# Altium PCB C8T6.PcbDoc
Units mil, origin at the board's own origin, x right, y up, seen from the top; angles counter-clockwise.
Board outline 2210.03 x 1420.03 mil, 2 copper layers (Top Layer, Bottom Layer); 41 components, 55 nets, 198 pads, 55 vias.
Unrouted connection lines stored in the file: 1.
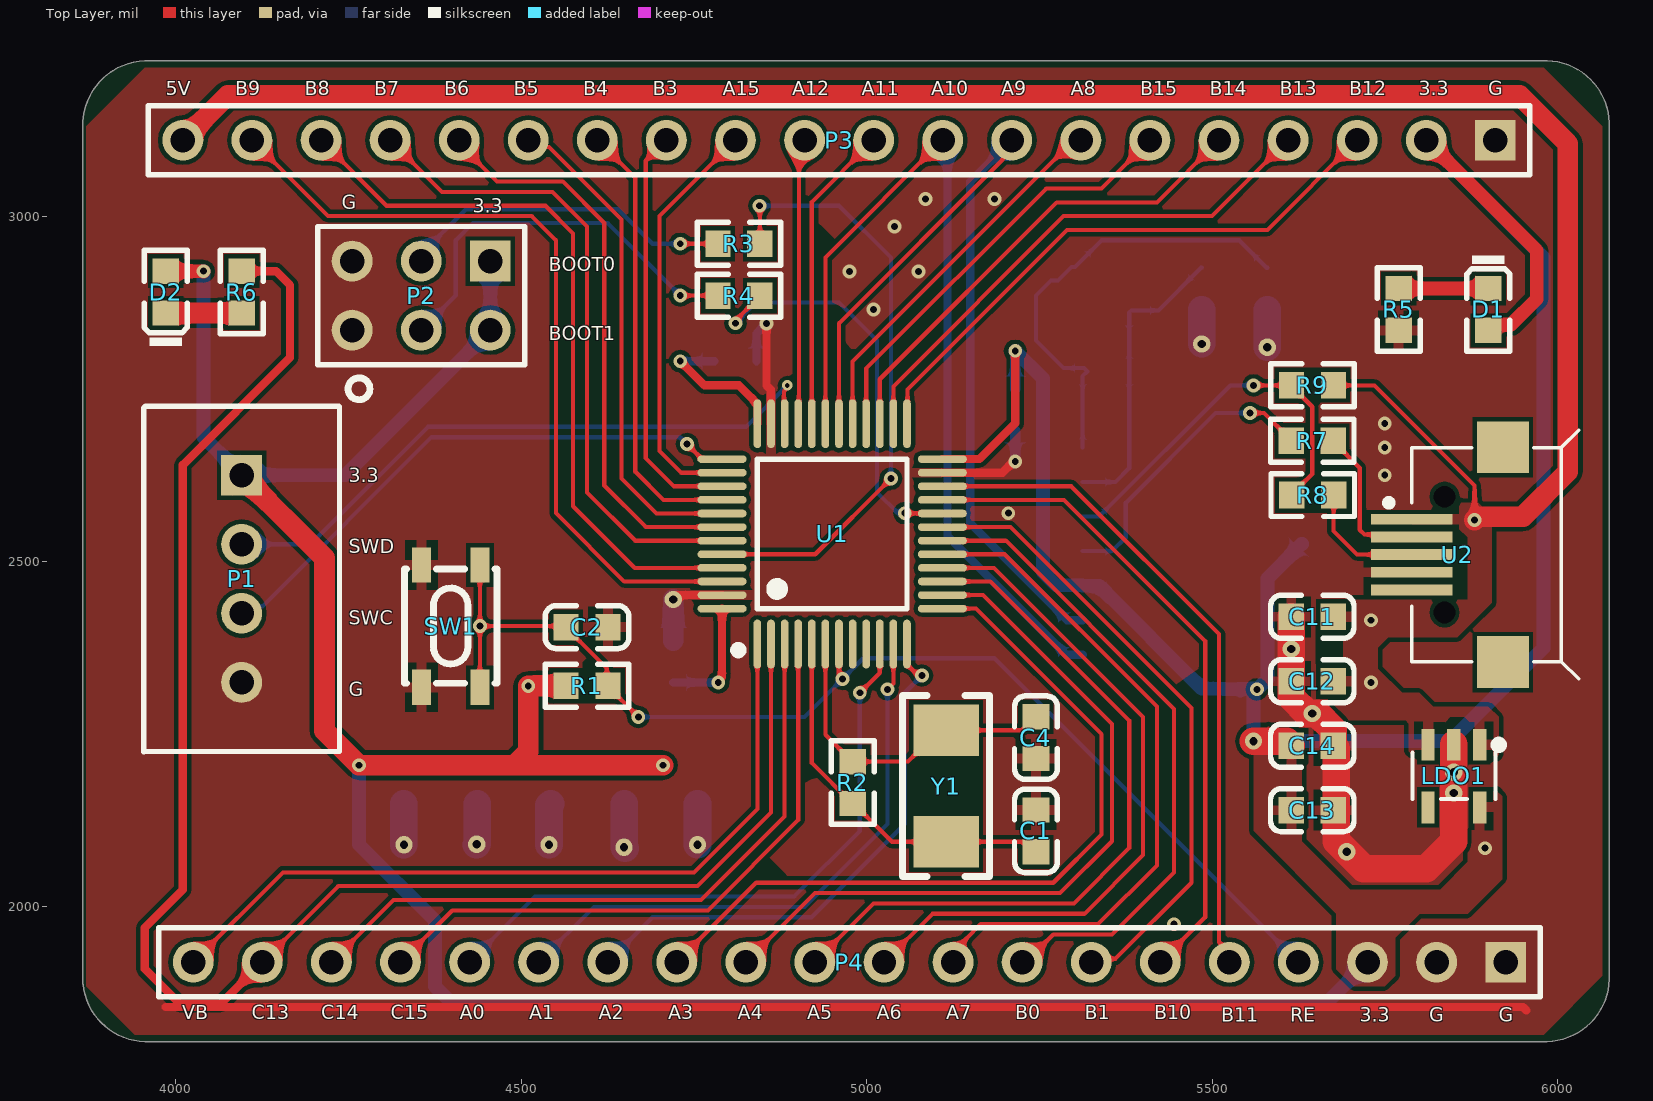
[diagram p0: Top Layer view]
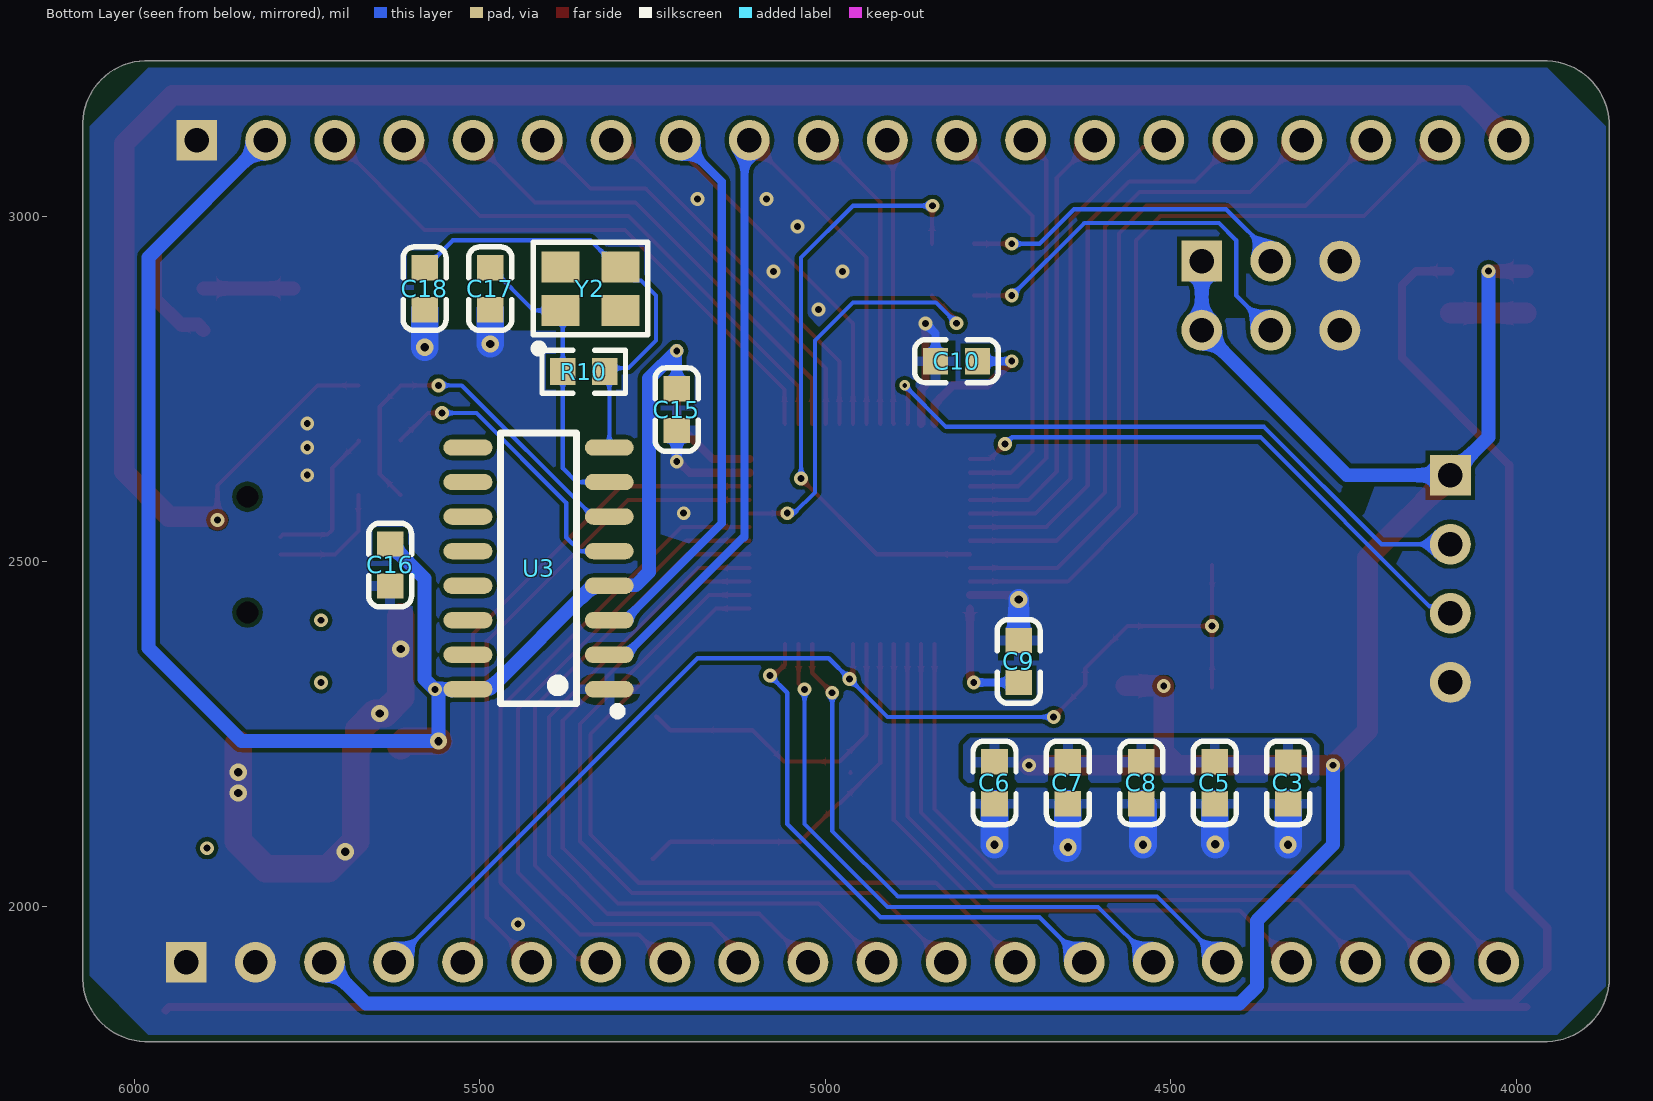
[diagram p1: Bottom Layer view, seen from below]
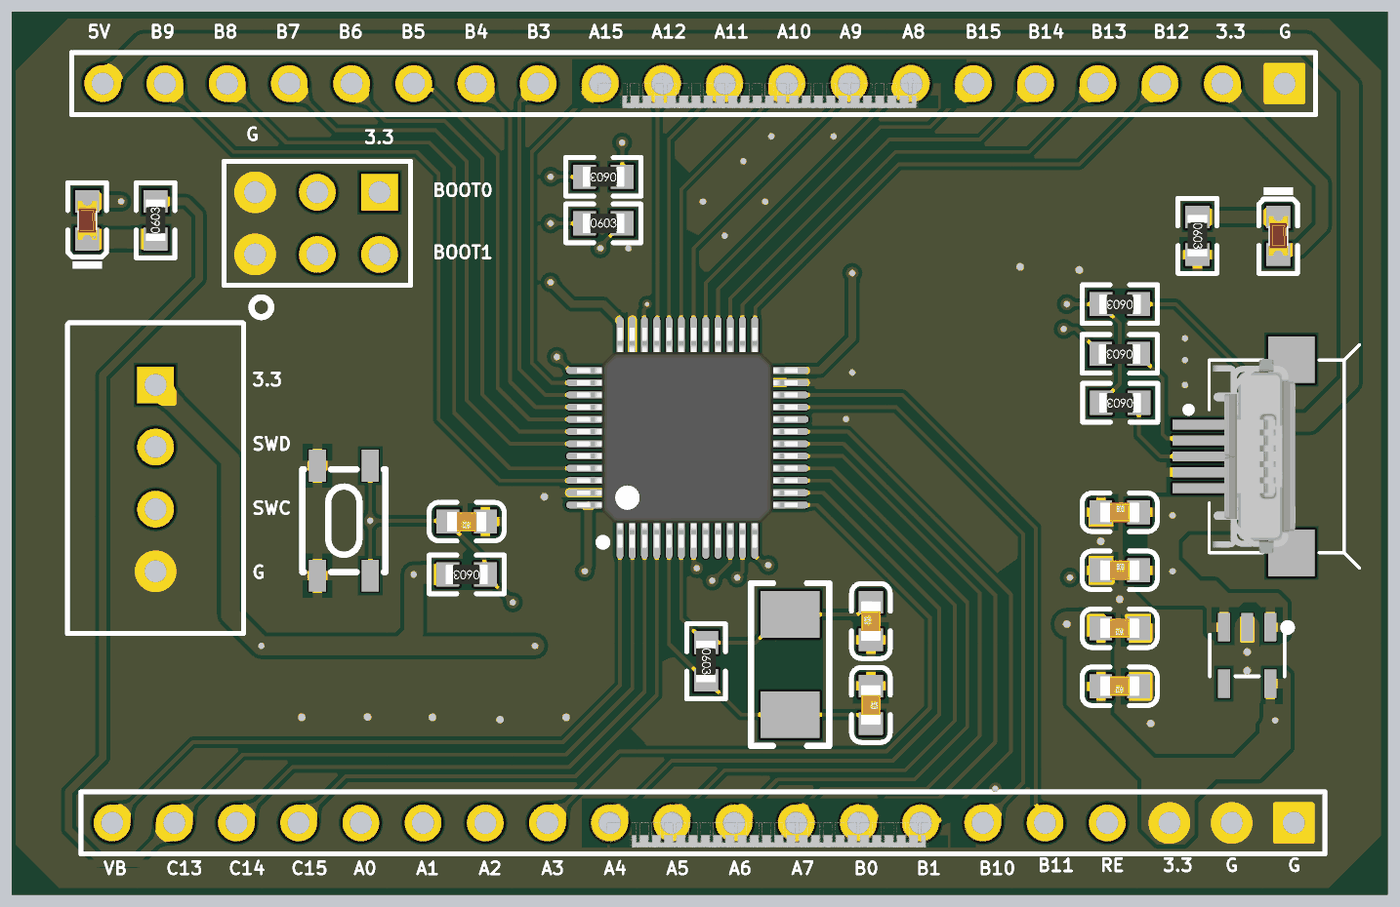
[diagram p2: 3D render of the assembled board from above, using the file's embedded part models]
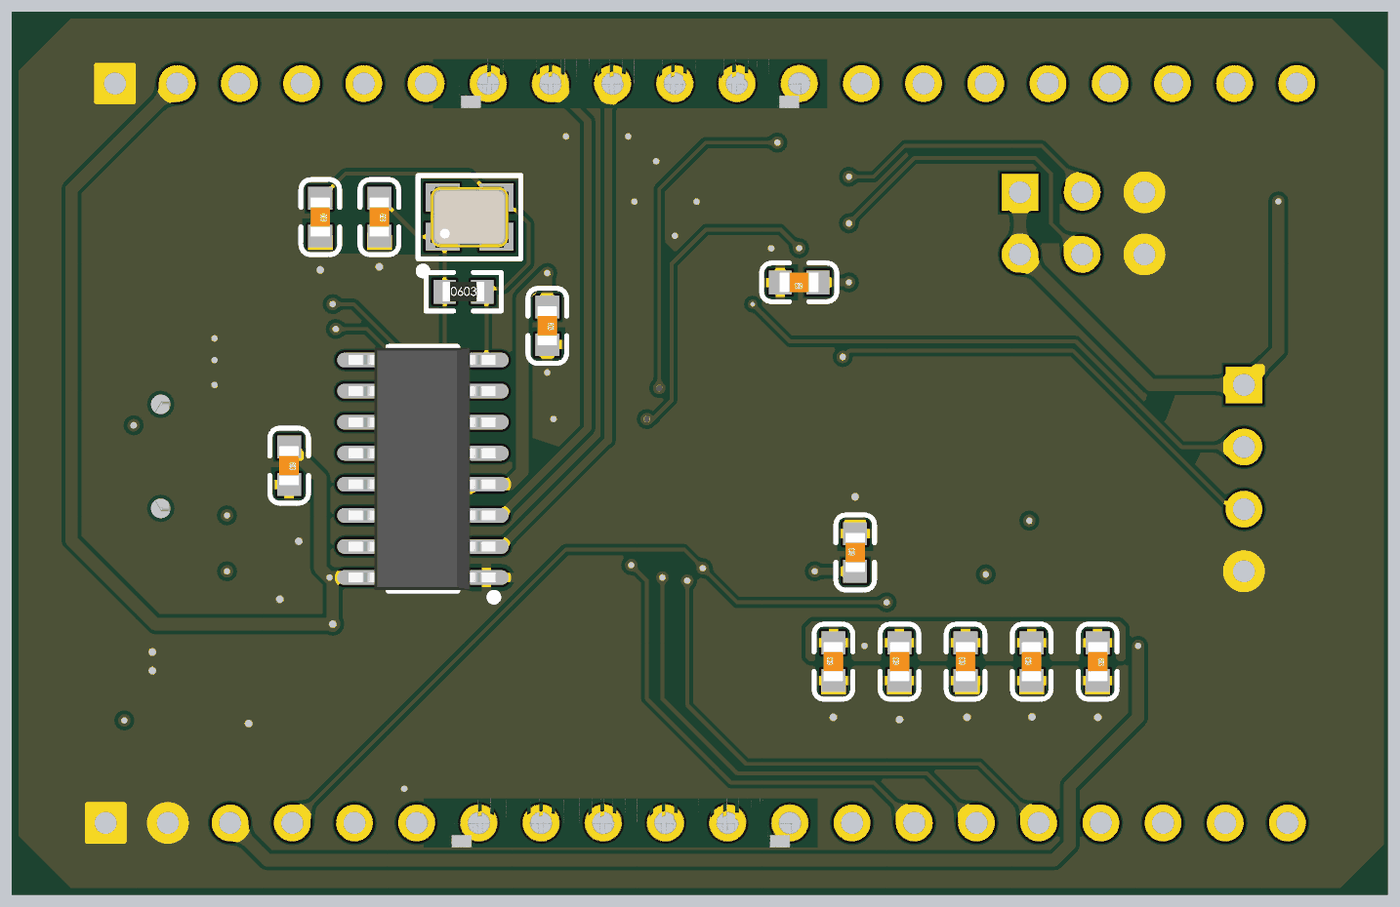
[diagram p3: 3D render of the assembled board from below, using the file's embedded part models]

## Layer stack, top to bottom
Top Solder: solder mask 0.4, Solder Resist, Dk 3.5
Top Layer: signal copper 1.4
Dielectric 1: dielectric 12.6, FR-4, Dk 4.8
Bottom Layer: signal copper 1.4
Bottom Solder: solder mask 0.4, Solder Resist, Dk 3.5

## Board outline
3865.45,1887.89 ccw(c3957.5,1897.5) 3954.86,1804.99 ccw(c3955,1810) 3955,1804.98 5985,1804.98 ccw(c5985,1810) 5985.14,1804.99 ccw(c5982.5,1897.5) 6075.01,1894.86 ccw(c6070,1895) 6075.02,1895 6075.02,3135 ccw(c6070,3135) 6075.01,3135.14 ccw(c5982.5,3132.5) 5985.14,3225.01 ccw(c5985,3220) 5985,3225.01 3955,3225.01 ccw(c3955,3220) 3954.79,3225.01 ccw(c3958.74,3131.26) 3864.99,3127.41 3864.99,1890 ccw(c3870,1890)

## Design rules (kind name [scope] priority, off if disabled: settings)
Clearance [All] p1: gap=6 ignorepadtopadclearanceinfootprint=FALSE
PlaneClearance [All] p1: clearance=8
PlaneConnect [All] p1: pad.planeconnectstyle=Relief pad.reliefexpansion=20 pad.reliefentries=4 pad.reliefconductorwidth=15 pad.reliefairgap=10 via.planeconnectstyle=Direct via.reliefexpansion=20 via.reliefentries=4 via.reliefconductorwidth=10 via.reliefairgap=10
PolygonConnect [All] p1: thpad.connectstyle=Direct thpad.reliefconductorwidth=10 thpad.reliefentries=4 thpad.polygonreliefangle="90 Angle" thpad.airgapwidth=10 smdpad.connectstyle=Relief smdpad.reliefconductorwidth=15 smdpad.reliefentries=4 smdpad.polygonreliefangle="90 Angle" smdpad.airgapwidth=10 via.connectstyle=Direct via.reliefconductorwidth=15 via.reliefentries=4 via.polygonreliefangle="90 Angle" via.airgapwidth=10
RoutingVias [All] p1: holewidth=12 width=24 viastyle="Through Hole" minholewidth=4 minwidth=4 maxholewidth=50 maxwidth=50
SilkToSolderMaskClearance [IsPad] p1: minsilkscreentomaskgap=2 clearancetoexposedcopper=TRUE
SolderMaskExpansion [All] p1: expansion=4 istentingtop=FALSE
Width [All] p1: maxlimit=40 minlimit=6 preferedwidth=6
27 further rules are at their usual default settings.

## Components (designator, comment, footprint, x,y, rotation, side; value= is the part's Value field where it differs from the comment)
C1 "22pF (220) 5% 50V" 0603_C 5245,2110 r270 top
C2 "100nF (104) 10% 50V" 0603_C 4595,2405 r180 top
C3 "1uF (105) 10% 50V" 0603_C 4330,2179.59 r270 bottom
C4 "22pF (220) 5% 50V" 0603_C 5245,2245 r90 top
C5 "1uF (105) 10% 50V" 0603_C 4436.25,2179.6 r90 bottom
C6 "1uF (105) 10% 50V" 0603_C 4755,2179.59 r90 bottom
C7 "1uF (105) 10% 50V" 0603_C 4648.75,2179.59 r90 bottom
C8 "1uF (105) 10% 50V" 0603_C 4542.5,2179.59 r90 bottom
C9 "100nF (104) 10% 50V" 0603_C 4720,2355.31 r90 bottom
C10 "100nF (104) 10% 50V" 0603_C 4810,2790 r0 bottom
C11 "1uF (105) 10% 50V" 0603_C 5645,2420 r0 top
C12 "100nF (104) 10% 50V" 0603_C 5645,2326.67 r0 top
C13 "1uF (105) 10% 50V" 0603_C 5645,2140 r180 top
C14 "100nF (104) 10% 50V" 0603_C 5645,2233.33 r180 top
C15 "100nF (104) 10% 50V" 0603_C 5215,2720 r270 bottom
C16 "100nF (104) 10% 50V" 0603_C 5630,2495 r270 bottom
C17 "22pF (220) 5% 50V" 0603_C 5485,2895 r270 bottom
C18 "22pF (220) 5% 50V" 0603_C 5580,2895 r270 bottom
D1 "红灯 0603" 0603_LED_S1 5900,2865 r270 top
D2 "红灯 0603" 0603_LED_S1 3985,2890 r90 top
LDO1 "ME6211C33M5G-N" SOT-23-5_L3.0-W1.7-P0.95-LS2.8-BL 5855,2190 r180 top
P1 "SWD" HDR4x1 4095,2625 r270 top
P2 "Header 3X2" HDR2X3 4455,2935 r180 top
P3 "Header 20" HDR1X20 5910,3110 r180 top
P4 "Header 20" HDR1X20 5925,1920 r180 top
R1 "10KΩ (1002) ±1%" 0603_R 4595,2320 r180 top
R2 "1MΩ (1004) ±1%" 0603_R 4980,2180 r270 top
R3 "10KΩ (1002) ±1%" 0603_R 4815,2960 r180 top
R4 "10KΩ (1002) ±1%" 0603_R 4815,2885 r0 top
R5 "10KΩ (1002) ±1%" 0603_R 5770,2865 r270 top
R6 "10KΩ (1002) ±1%" 0603_R 4095,2890 r90 top
R7 "20Ω (20R0) ±1%" 0603_R 5645,2675 r180 top
R8 "20Ω (20R0) ±1%" 0603_R 5645.69,2596.24 r180 top
R9 "4.7KΩ (4701) ±1%" 0603_R 5645.32,2755 r180 top
R10 "1MΩ (1004) ±1%" 0603_R 5349.69,2775 r180 bottom
SW1 "KEY_SMD_4P" "SW-SMD_4P-L4.2-W3.3-P2.15-LS5.1 - duplicate" 4440,2495 r270 top
U1 "STM32F103C8T6" LQFP-48_7x7x05P 4950,2540 r0 top
U2 "USB-mrico" Micro_USB 5855,2510 r90 top
U3 "CH340G" SOIC-16_150mil 5415,2490 r90 bottom
Y1 "8MHz ±20ppm 20pF" SMD-5032_2P 5115,2175 r270 top
Y2 "12MHZ 20PF 10PPM" SMD-3225_4P 5340,2895 r180 bottom

## Footprints (in the part's own frame and the unit in brackets; to place one, negate y for a bottom-side part, rotate by r counter-clockwise, add the part's x,y. Pads: shape width x height; smd on the part's side, far side on the other; paste and mask are expansions set on the pad)
0603_C [mm]
  rect 0.93x0.98 smd: 1(-0.77,0) 2(0.77,0)
  silkscreen extent -1.53,-0.79 1.54,0.79, body extent -0.8,-0.4 0.8,0.4, height 0.3
0603_LED_S1 [mm]
  rect 0.93x0.98 smd: A(0.77,0) K(-0.77,0)
  silkscreen extent -1.98,-0.79 1.54,0.79, body extent -0.8,-0.4 0.8,0.4, height 0.6
0603_R [mm]
  rect 0.93x0.98 smd: 1(-0.77,0) 2(0.77,0)
  silkscreen extent -1.53,-0.79 1.54,0.79, body extent -0.85,-0.4 0.85,0.4, height 0.56
HDR1X20 [mm] "Connector; Header; 20 Position"
  rect 1.5x1.5 hole 0.9: 1(0,0)
  round 1.5 hole 0.9: 2(2.54,0) 3(5.08,0) 4(7.62,0) 5(10.16,0) 6(12.7,0) 7(15.24,0) 8(17.78,0) 9(20.32,0) 10(22.86,0) 11(25.4,0) 12(27.94,0) 13(30.48,0) 14(33.02,0) 15(35.56,0) 16(38.1,0) 17(40.64,0) 18(43.18,0) 19(45.72,0) 20(48.26,0)
  silkscreen extent -1.27,-1.27 49.53,1.27, body extent 12.98,-1 29.08,1, height 2.85
HDR2X3 [mm] "Connector; Header; 3x2 Position"
  rect 1.5x1.5 hole 0.9: 1(0,0)
  round 1.5 hole 0.9: 2(0,2.54) 3(2.54,0) 4(2.54,2.54) 5(5.08,0) 6(5.08,2.54)
  silkscreen extent -1.27,-1.27 6.35,3.81
HDR4x1 [mm] "4X1排针"
  rect 1.5x1.5 hole 0.9: 1(0,0)
  round 1.5 hole 0.9: 2(2.54,0) 3(5.08,0) 4(7.62,0)
  silkscreen extent -3.58,-3.6 10.16,4.72
LQFP-48_7x7x05P [mm]
  oval 0.28x1.8 smd mask+0.051: 1(-2.75,-4.05) 2(-2.25,-4.05) 3(-1.75,-4.05) 4(-1.25,-4.05) 5(-0.75,-4.05) 6(-0.25,-4.05) 7(0.25,-4.05) 8(0.75,-4.05) 9(1.25,-4.05) 10(1.75,-4.05) 11(2.25,-4.05) 12(2.75,-4.05) 25(2.75,4.05) 26(2.25,4.05) 27(1.75,4.05) 28(1.25,4.05) 29(0.75,4.05) 30(0.25,4.05) 31(-0.25,4.05) 32(-0.75,4.05) 33(-1.25,4.05) 34(-1.75,4.05) 35(-2.25,4.05) 36(-2.75,4.05)
  oval 1.8x0.28 smd mask+0.051: 13(4.05,-2.75) 14(4.05,-2.25) 15(4.05,-1.75) 16(4.05,-1.25) 17(4.05,-0.75) 18(4.05,-0.25) 19(4.05,0.25) 20(4.05,0.75) 21(4.05,1.25) 22(4.05,1.75) 23(4.05,2.25) 24(4.05,2.75) 37(-4.05,2.75) 38(-4.05,2.25) 39(-4.05,1.75) 40(-4.05,1.25) 41(-4.05,0.75) 42(-4.05,0.25) 43(-4.05,-0.25) 44(-4.05,-0.75) 45(-4.05,-1.25) 46(-4.05,-1.75) 47(-4.05,-2.25) 48(-4.05,-2.75)
  silkscreen extent -3.6,-4.42 2.75,2.75, body extent -4.5,-4.5 4.5,4.5, height 1.6
Micro_USB [mm]
  rect 0.4x3 smd: 1(1.3,1.679) 2(0.65,1.679) 3(0,1.679) 4(-0.65,1.679) 5(-1.3,1.679)
  round 0 hole 0.8 unplated: MH1(2.127,0.471) MH2(-2.127,0.471)
  rect 1.9x1.9 smd: ""(-3.95,-1.679) ""(3.95,-1.679)
  silkscreen extent -4.57,-4.46 4.57,2.64, body extent -3.97,-1.85 3.98,1.54, height 5.58
SMD-3225_4P [mm]
  rect 1.4x1.15 smd: 1(-1.1,-0.8) 2(1.1,-0.8) 3(1.1,0.8) 4(-1.1,0.8)
  silkscreen extent -2.1,-2.35 2.1,1.7, body extent -1.6,-1.25 1.6,1.25, height 0.61
SMD-5032_2P [mm]
  rect 1.9x2.4 smd: 1(-2.05,0) 2(2.05,0)
  silkscreen extent -3.33,-1.6 3.33,1.6
SOIC-16_150mil [mm]
  oval 0.6x1.8 smd: 1(-4.445,-2.6) 2(-3.175,-2.6) 3(-1.905,-2.6) 4(-0.635,-2.6) 5(0.635,-2.6) 6(1.905,-2.6) 7(3.175,-2.6) 8(4.445,-2.6) 9(4.445,2.6) 10(3.175,2.6) 11(1.905,2.6) 12(0.635,2.6) 13(-0.635,2.6) 14(-1.905,2.6) 15(-3.175,2.6) 16(-4.445,2.6)
  silkscreen extent -5.4,-3.05 4.97,1.4, body extent -4.95,-2.97 4.95,3.03, height 1.75
SOT-23-5_L3.0-W1.7-P0.95-LS2.8-BL [mm]
  rect 0.49x1.157 smd paste+0 mask+0.051: 1(-0.823,-1.143) 2(0.127,-1.143) 3(1.077,-1.143)
  rect 0.49x1.175 smd paste+0 mask+0.051: 4(1.077,1.164) 5(-0.823,1.164)
  silkscreen extent -1.67,-1.28 1.65,0.86
"SW-SMD_4P-L4.2-W3.3-P2.15-LS5.1 - duplicate" [mm]
  rect 1.3x0.7 smd paste+0 mask+0.051: 1(0,0) 2(4.5,0) 3(0,-2.15) 4(4.5,-2.15)
  silkscreen extent 0.15,-2.78 4.35,0.63

## Part data
C1 C4 C17 C18: library part "0603 22pF (220) 5% 50V", "贴片电容", Package=0603, SuppliersPartNumber=C1653, ComponentLink1Description=供应商链接, ComponentLink1URL=http://www.szlcsc.com/product/details_2005.html, Supplier=LC
C2 C9 C10 C12 C14 C15 C16: library part "0603 100nF (104) 10% 50V", "贴片电容", Package=0603, SuppliersPartNumber=C14663, ComponentLink1Description=供应商链接, ComponentLink1URL=http://www.szlcsc.com/product/details_15331.html, Supplier=LC
C3 C5 C6 C7 C8 C11 C13: library part "0603 1uF (105) 10% 50V", "贴片电容", Package=0603, SuppliersPartNumber=C15849, ComponentLink1Description=供应商链接, ComponentLink1URL=http://www.szlcsc.com/product/details_16531.html, Supplier=LC
D1 D2: library part "0603 红灯", "发光二极管", Package=0603, SuppliersPartNumber=C2286, ComponentLink1Description=供应商链接, ComponentLink1URL=http://www.szlcsc.com/product/details_2659.html, Supplier=LC
LDO1: Current - Supply (Max)=60μA, JLCPCB Part Class="Extended Part", Manufacturer=MICRONE(南京微盟), Operating Temperature=-40℃~150℃, Output Current (Max)=500mA, Quiescent Current (Iq)=-, Voltage - Input (Max)=6V, Voltage - Output (Fixed)=3.3V, Voltage Dropout (Max)="260mV @ 200mA(typ)", Add into BOM=yes, Convert to PCB=yes, Datasheet=https://atta.szlcsc.com/upload/public/pdf/source/20170918/C82942_1505727073070976520.pdf, Device=ME6211C33M5G-N, Enabling feet=-, LCSC Part Name=ME6211C33M5G-N, Manufacturer Part=ME6211C33M5G-N, Name=ME6211C33M5G-N, Number of Output Channels=1, Output Configuration=正, Output Type=固定, Ripple Rejection (PSRR)="70dB ~ 62dB(1kHz ~ 10kHz)", Supplier=LCSC, Supplier Footprint=SOT-23-5, Supplier Part=C82942, Symbol=ME6211C33M5G-N, Voltage - Output (adj)=-
P2: "Header, 3-Pin, Dual row", LatestRevisionDate=17-Jul-2002, LatestRevisionNote="Re-released for DXP Platform.", Publisher="Altium Limited"
P3 P4: "Header, 20-Pin", LatestRevisionDate=17-Jul-2002, LatestRevisionNote="Re-released for DXP Platform.", Publisher="Altium Limited"
R1 R3 R4 R5 R6: library part "0603 10KΩ (1002) 1%_1", "贴片电阻", Package=0603, SuppliersPartNumber=C25804, ComponentLink1Description=供应商链接, ComponentLink1URL=http://www.szlcsc.com/product/details_26547.html, Supplier=LC
R2 R10: library part "0603 1MΩ (1004) 1%", "贴片电阻", Package=0603, SuppliersPartNumber=C22935, ComponentLink1Description=供应商链接, ComponentLink1URL=http://www.szlcsc.com/product/details_23662.html, Supplier=LC
R7 R8: library part "0603 20Ω (20R0) 1%", "贴片电阻", Package=0603, SuppliersPartNumber=C22950, ComponentLink1Description=供应商链接, ComponentLink1URL=http://www.szlcsc.com/product/details_23677.html, Supplier=LC
R9: library part "0603 4.7KΩ (4701) 1%", "贴片电阻", Package=0603, SuppliersPartNumber=C23162, ComponentLink1Description=供应商链接, ComponentLink1URL=http://www.szlcsc.com/product/details_23889.html, Supplier=LC
U1: "ARM", Package=LQFP-48_7x7x05P, SuppliersPartNumber=C8734, ComponentLink1Description=供应商链接, ComponentLink1URL=http://www.szlcsc.com/product/details_9243.html, Supplier=LC
U2: library part usb-STM
U3: library part CH340G_[C14267], "USB", Package=SOIC-16_150mil, SuppliersPartNumber=C14267, ComponentLink1Description=供应商链接, ComponentLink1URL=http://www.szlcsc.com/product/details_14927.html, Supplier=LC
Y1: library part "SMD-5032_2P 8MHz 20ppm 20pF", "贴片晶振", Package=SMD-5032_2P, SuppliersPartNumber=C115962, ComponentLink1Description=供应商链接, ComponentLink1URL=http://www.szlcsc.com/product/details_117214.html, Supplier=LC
Y2: library part "SMD-3225_4P  12MHZ 20PF 10PPM", "贴片晶振", Package=SMD-3225_4P, SuppliersPartNumber=C9002, ComponentLink1Description=供应商链接, ComponentLink1URL=http://www.szlcsc.com/product/details_9522.html, Supplier=LC

## Via types
v1: diameter 20, hole 10, Top Layer to Bottom Layer, tented both sides, 40 vias
v2: diameter 25, hole 12, Top Layer to Bottom Layer, tented both sides, 14 vias
v3: diameter 15, hole 7, Top Layer to Bottom Layer, tented both sides, 1 vias

## Nets (pads, with @x,y where several pads share a name; then routed paths per layer and width w, separated by ;. In a path a pad name is that pad's centre, name@x,y a point inside that pad or via, vN(x,y) a via of type N, cw(c..) or ccw(c..) an arc to the next point about the centre after c; other vN are vias at no path point)
5V: C11.2 C12.2 LDO1.1 LDO1.3 P3.20 R9.1 U2.1 | length 3014.3
  Top Layer w6: R9.1 5735,2755 5880,2610 v1(5880,2560)
  Top Layer w30: P3.20 4075,3175 5945,3175 6015,3105 6015,2630 5950,2565 5885,2565 v1(5880,2560)
  other v1: 5730,2325 5730,2415
BOOT0: R3.1 U1.44 | length 886
  Top Layer w6: U1.44 4925.47,2510.47 v1(5035,2620) ; v1(4845,3015) 4845.31,3014.69 R3.1
  Bottom Layer w6: v1(4845,3015) 4960,3015 5035,2940 v1(5035,2620)
BOOT1: R4.2 U1.20 | length 621.9
  Top Layer w6: v1(4810,2845) 4810,2848.7 4845.32,2884.02 R4.2 ; v1(5055,2570) 5055.24,2569.76 5109.21,2569.76 U1.20
  Bottom Layer w6: v1(4810,2845) 4840,2875 4960,2875 5015,2820 5015,2600 5045,2570 v1(5055,2570)
D+: R7.2 U3.5 | length 431.3
  Top Layer w6: v1(5555,2715) 5575,2715 5598.71,2691.29 5599.38,2691.29 5614.68,2675.98 R7.2
  Bottom Layer w6: U3.5 5355,2515 5375,2535 5375,2585 5505,2715 v1(5555,2715)
D-: R8.2 R9.2 U3.6 | length 564.5
  Top Layer w6: v1(5560,2755) R9.2 5615,2754.02 5645,2724.02 5645,2626.85 5615.38,2597.23 R8.2
  Bottom Layer w6: U3.6 5336.26,2565 5526.26,2755 v1(5560,2755)
GND: C1.1 C2.1 C3.2 C4.1 C5.1 C6.1 C7.1 C8.1 C9.2 C10.2 C11.1 C12.1 C13.1 C14.1 C15.2 C16.2 C17.2 C18.2 LDO1.2 P1.4 P2.5 P2.6 P3.1 P4.1 P4.2 R5.2 SW1.3 SW1.4 U1.23 U1.35 U1.47 U2.4 U2.5 U3.1 | length 3581.8
  Top Layer w12: 3985,1855 5950,1855 5955,1850 ; v2(4720,2445) 4723.52,2445 4729.94,2451.42 U1.47 ; v1(4855,2844.68) 4855,2755 4860.93,2749.07 4860.93,2699.94 U1.35 ; U1.23 5196.42,2628.58 5212.84,2645 v1(5215,2645)
  Top Layer w40: C11.1 C12.1 5614.69,2303.43 5638.12,2280 5651.88,2280 5675.31,2256.57 C14.1 5680,2228.65 5680,2095 5720,2055 5810,2055 5850,2095 LDO1.2
  Bottom Layer w12: C10.2 4840.32,2830 v1(4855,2844.68) v1@4855,2845
  Bottom Layer w15: v1(5215,2645) C15.2
  Bottom Layer w30: C9.2 v2(4720,2445)
  Bottom Layer w40: v2(4330,2090) C3.2 ; v2@4435,2090 4436.25,2091.25 C5.1 ; v2(4540,2090) 4540,2146.78 C8.1 ; C7.1 v2(4648.75,2086.25) v2@4650,2085 ; v2(4755,2090) C6.1 ; v2(5485,2815) C17.2 ; v2(5580,2810) C18.2
  other v1: 5445,1975 5205,2570 5750,2625 5750,2665 5750,2700 5010,2865 4975,2920 5075,2920 5040,2985 5085,3025 5185,3025
  other v2: 5695,2080 4435.62,2090.62 5850,2165 5850,2195 5645,2280 5614.69,2373.33
NetC9_1: C9.1 U1.48 | length 174
  Top Layer w12: v1(4785,2325) 4785,2327.16 4790.55,2332.72 U1.48
  Bottom Layer w12: C9.1 v1(4785,2325)
NetC10_1: C10.1 U1.36 | length 216.9
  Top Layer w12: v1(4730,2790) 4765,2755 4815.12,2755 4841.73,2728.39 U1.36
  Bottom Layer w6: C10.1 C10.1@4779.69,2790.98
  Bottom Layer w12: v1(4730,2790) C10.1
NetC17_1: C17.1 R10.1 U3.7 Y2.1 | length 432.8
  Bottom Layer w6: U3.7 5360,2615 5380,2635 R10.1 5380,2860.2 Y2.1 5422.21,2863.5 5484.02,2925.31 C17.1
NetC18_1: C18.1 R10.2 U3.8 Y2.3 | length 655.4
  Bottom Layer w6: U3.8 5312.64,2768.27 R10.2 5314.37,2780 5285,2780 5245,2820 5245,2885 5266.86,2906.86 5277.05,2906.86 Y2.3 5301.61,2926.5 5340.12,2965 5539.33,2965 5579.02,2925.31 C18.1
NetD1_K: D1.K R5.1 | length 130
  Top Layer w20: R5.1 D1.K
NetD2_K: D2.K R6.1 | length 110
  Top Layer w30: D2.K R6.1
NetP2_3: P2.3 R3.2 | length 487.3
  Top Layer w6: v1(4730,2960) R3.2
  Bottom Layer w6: P2.3 4355,2945 4420,3010 4640,3010 4690,2960 v1(4730,2960)
NetP2_4: P2.4 R4.1 | length 584.2
  Top Layer w6: v1(4730,2885) R4.1
  Bottom Layer w6: P2.4 4405,2885 4405,2965 4430,2990 4625,2990 v1(4730,2885)
NetR7_1: R7.1 U2.2 | length 224.5
  Top Layer w6: R7.1 5675.31,2674.02 5713.73,2635.6 5713.73,2545.9 5720.47,2539.16 5785.33,2539.16 U2.2
NetR8_1: R8.1 U2.3 | length 179.2
  Top Layer w6: R8.1 5676.01,2543.99 5710,2510 U2.3
OSC_IN: C1.2 R2.2 U1.5 Y1.2 | length 559.2
  Top Layer w6: U1.5 4920.47,2208.23 4979.02,2149.68 R2.2 4980.98,2149.68 5036.38,2094.29 Y1.2 5224.41,2094.29 5249.02,2069.68 C1.2@5250,2069.68
OSC_OUT: C4.2 R2.1 U1.6 Y1.1 | length 480.2
  Top Layer w6: U1.6 4940.16,2249.17 4979.02,2210.31 R2.1 5059.76,2210.31 5105.16,2255.71 Y1.1 5224.41,2255.71 5244.02,2275.32 C4.2 ; R2.1@4963.71,2194.02 R2.1@4963.71,2195.01
PA0: P4.16 U1.10 | length 926.2
  Top Layer w6: v1(4990,2310) 5018.9,2338.9 U1.10
  Bottom Layer w6: P4.16 4520,2015 4895,2015 4990,2110 v1(4990,2310)
PA1: P4.15 U1.11 | length 851.9
  Top Layer w6: v1(5030,2315) 5038.58,2323.58 U1.11
  Bottom Layer w6: P4.15 4605,2000 4910,2000 5030,2120 v1(5030,2315)
PA2: P4.14 U1.12 | length 796.3
  Top Layer w6: U1.12 5058.27,2350.63 5073.9,2335 v1(5080,2335)
  Bottom Layer w6: P4.14 4690,1985 4920,1985 5055,2120 5055,2310 v1(5080,2335)
PA3: P4.13 U1.13 | length 1142.5
  Top Layer w6: P4.13 4840,2035 5270,2035 5340,2105 5340,2250 5158.27,2431.73 U1.13
PA4: P4.12 U1.14 | length 1095.3
  Top Layer w6: P4.12 4925,2020 5280,2020 5355,2095 5355,2265 5168.58,2451.42 U1.14
PA5: P4.11 U1.15 | length 1062.2
  Top Layer w6: P4.11 5010,2005 5300,2005 5380,2085 5380,2270 5178.9,2471.1 U1.15
PA6: P4.10 U1.16 | length 1019.1
  Top Layer w6: P4.10 5095,1990 5315,1990 5400,2075 5400,2275 5184.21,2490.79 U1.16
PA7: P4.9 U1.17 | length 993.7
  Top Layer w6: U1.17 5199.53,2510.47 5420,2290 5420,2060 5335,1975 5165,1975 5145.08,1955.08 5145.08,1954.41 5125,1934.33 P4.9
PA8: P3.7 U1.29 | length 553.3
  Top Layer w6: U1.29 4979.53,2789.53 5300,3110 P3.7
PA9: P3.8 U1.30 U3.3 | length 1314.7
  Top Layer w6: U1.30 4959.84,2844.84 5196.26,3081.26 5196.26,3081.9 5210,3095.64 P3.8
  Bottom Layer w12: P3.8 5150,3050 5150,2555 5290,2415 U3.3
PA10: P3.9 U1.31 U3.2 | length 1324.8
  Top Layer w6: U1.31 4940.16,2940.16 P3.9
  Bottom Layer w12: P3.9 5117.03,3102.97 5117.03,2535 5119.02,2535 5289.02,2365 U3.2
PA11: P3.10 U1.32 | length 447.6
  Top Layer w6: U1.32 4920.47,3020.47 P3.10
PA12: P3.11 U1.33 | length 414.4
  Top Layer w6: U1.33 4901.75,2700.41 4901.75,3101.75 P3.11
PA15: P3.12 U1.38 | length 599.1
  Top Layer w6: U1.38 4731.42,2628.58 4700,2660 4700,3000 P3.12
PB0: P4.8 U1.18 | length 946.8
  Top Layer w6: U1.18 5201.36,2530.16 5445,2286.51 5445,2050 5355,1960 5270,1960 5230,1920 P4.8
PB1: P4.7 U1.19 | length 914.6
  Top Layer w6: U1.19 5208.07,2549.84 5470,2287.91 5470,2035 5360.01,1925.01 5330.01,1925.01 P4.7
PB3: P3.13 U1.39 | length 600
  Top Layer w6: P3.13 4680,3080 4680,2650 4721.1,2608.9 U1.39
PB4: P3.14 U1.40 | length 645.2
  Top Layer w6: P3.14 4665,3055 4665,2630 4705.79,2589.21 U1.40
PB5: P3.15 U1.41 | length 724.1
  Top Layer w6: P3.15 4520.15,3099.85 4540.15,3099.85 4645,2995 4645,2620 4695.47,2569.53 U1.41
PB6: P3.16 U1.42 | length 838.1
  Top Layer w6: P3.16 4410,3105 4465,3050 4560,3050 4620,2990 4620,2610 4680.16,2549.84 U1.42
PB7: P3.17 U1.43 | length 946.3
  Top Layer w6: P3.17 4385,3035 4545,3035 4595,2985 4595,2600 4664.84,2530.16 U1.43
PB8: P3.18 U1.45 | length 1068.4
  Top Layer w6: P3.18 4305,3015 4535,3015 4575,2975 4575,2580 4664.21,2490.79 U1.45
PB9: P3.19 U1.46 | length 1176.6
  Top Layer w6: P3.19 4220,3000 4515,3000 4550,2965 4550,2570 4648.9,2471.1 U1.46
PB10: P4.6 U1.21 | length 957.1
  Top Layer w6: U1.21 5285.79,2589.21 5490,2385 5490,1985 P4.6
PB11: P4.5 U1.22 | length 970.4
  Top Layer w6: U1.22 5296.1,2608.9 5510,2395 5510,1949.36 5525,1934.36 P4.5
PB12: P3.3 U1.25 | length 850.4
  Top Layer w6: U1.25 5059.23,2700.41 5059.23,2749.23 5290,2980 5580,2980 P3.3
PB13: P3.4 U1.26 | length 773.2
  Top Layer w6: U1.26 5038.58,2753.58 5285,3000 5500,3000 P3.4
PB14: P3.5 U1.27 | length 698.9
  Top Layer w6: U1.27 5018.9,2763.9 5275,3020 5420,3020 P3.5
PB15: P3.6 U1.28 | length 627.6
  Top Layer w6: U1.28 4999.21,2779.21 5260,3040 5340,3040 P3.6
PC13: P4.19 R6.2 U1.2 | length 2441.2
  Top Layer w6: P4.19 4235,2030 4755,2030 4861.42,2136.42 U1.2
  Top Layer w12: 4014.97,1859.97 4005.03,1859.97 3955,1910 3955,1970 4010,2025 4010,2640 4165,2795 4165,2900 4144.68,2920.32 R6.2 ; 4015,1860 4065,1860 P4.19
PC14: P4.18 U1.3 | length 993
  Top Layer w6: P4.18 4315,2010 4760,2010 4881.1,2131.1 U1.3
PC15: P4.17 U1.4 | length 915.8
  Top Layer w6: P4.17 4400,1995 4770,1995 4900.79,2125.79 U1.4
RESET: C2.2 P4.4 R1.1 SW1.1 SW1.2 U1.7 | length 1701.7
  Top Layer w6: SW1.2 v1(4440,2406.42) ; SW1.1 v1(4440,2406.42) ; v1@4670,2275 v1(4669.33,2275) 4625.31,2319.02 R1.1 4623.7,2321.61 4623.7,2345 4562.28,2406.42 v1(4440,2406.42) ; U1.7 4959.84,2335.16 v1(4965,2330)
  Bottom Layer w6: v1(4669.33,2275) 4910,2275 v1(4965,2330) 4995,2360 5185,2360 5535,2010 5582.42,1962.58 P4.4
SWDCLK: P1.3 U1.37 | length 814.3
  Top Layer w6: v1(4740,2670) 4761.73,2648.27 U1.37
  Bottom Layer w6: P1.3 4105.15,2435.15 4125.15,2435.15 4370,2680 4729.49,2680 4739.49,2670 v1(4740,2670)
SWDIO: P1.2 U1.34 | length 943.3
  Top Layer w6: U1.34 4880.14,2700.41 4880.14,2733.88 4880,2734.02 4880,2746.21 4885,2751.21 v3(4885,2755)
  Bottom Layer w6: P1.2 4195,2525 4365,2695 4825,2695 v3(4885,2755)
VBAT: P4.20 U1.1 | length 1147.4
  Top Layer w6: P4.20 4155,2050 4750,2050 4841.73,2141.73 U1.1
VCC3V3: C3.1 C5.2 C6.2 C7.2 C8.2 C13.2 C14.2 C15.1 C16.1 D1.A D2.A LDO1.5 P1.1 P2.1 P2.2 P3.2 P4.3 R1.2 U1.24 U3.4 U3.16 | length 6824.5
  Top Layer w12: U1.24 5163.27,2648.27 5215,2700 v1(5215,2805)
  Top Layer w20: D2.A v1(4039.68,2920.32) v1@4040,2920 ; P3.2 5970,2950 5970,2880 5932.99,2842.99 5908.31,2842.99 D1.A
  Top Layer w30: P1.1 4215,2505 4215,2255 v1(4265,2205) 4490,2205 ; R1.2 v1(4510,2320) 4510,2225 4490,2205 ; v1(4705,2205) 4490,2205
  Top Layer w40: v2(5560,2240) 5608.02,2240 C14.2
  Bottom Layer w15: C15.1 v1(5215,2805)
  Bottom Layer w20: v1(4039.68,2920.32) 4039.68,2680.32 P1.1 4245,2625 P2.2 P2.1 ; v1(4265,2205) 4265,2090 4375,1980 4375,1885 4400,1860 5665,1860 P4.3 ; v1(5215,2805) 5255,2765 5255,2485 5274.31,2465.69 5311.94,2465.69 U3.4 5336.26,2465 5485.57,2315.69 5516.67,2315.69 U3.16 5539.04,2315 U3.16@5540.71,2313.33 ; U3.16@5539.04,2315.69 5564.31,2315.69 v1(5565,2315) ; C16.1 5629.02,2525.31 5620.71,2517.01 5620.71,2516.02 5580,2475.31 5580,2330 v1(5565,2315) ; P3.2 5980,2940 5980,2375 5845,2240 v2(5560,2240) 5560,2310 v1(5565,2315)
  other v1: 5895,2085
pads on no net: LDO1.4 U1.8 U1.9 U2. U2.MH1 U2.MH2 U3.9 U3.10 U3.11 U3.12 U3.13 U3.14 U3.15 Y2.2 Y2.4

## Polygon pours and split planes (outlines as drawn)
GND on Top Layer "GND_L01_P004" (solid, remove dead copper, pour order 4): 3955,3215 3870,3130 3870,1885 3940,1815 5980,1815 6065,1900 6065,3130 5980,3215
VCC3V3 on Top Layer "VCC3V3_L01_P003" (solid, remove dead copper, pour order 3): 5680,1995 5680,1910 5705,1885 5750,1885 5765,1900 5765,1955 5805,1995
5V on Top Layer "5V_L01_P001" (solid, remove dead copper, pour order 1): 5720,2560 5730,2550 5855,2550 5870,2535 5870,2445 5655,2445 5640,2430 5640,2315 5685,2270 5780,2270 5785,2265 5785,2225 5805,2205 5825,2205 5835,2215 5835,2265 5845,2275 5865,2275 5875,2265 5875,2215 5885,2205 5900,2205 5915,2220 5915,2275 5900,2290 5820,2290 5800,2310 5775,2310 5740,2345 5740,2375 5755,2390 5855,2390 5905,2440 5905,2565 5885,2585 5725,2585 5720,2580
VCC3V3 on Top Layer "VCC3V3_L01_P000" (solid, remove dead copper, pour order 0): 5875,2175 5870,2170 5870,2065 5830,2025 5700,2025 5630,2095 5630,2260 5620,2270 5590,2270 5560,2240 5560,2110 5680,1990 5870,1990 5920,2040 5920,2160 5905,2175
GND on Bottom Layer "GND_L02_P005" (solid, remove dead copper, pour order 5): 3955,3215 3870,3130 3870,1885 3940,1815 5980,1815 6065,1900 6065,3130 5980,3215
VCC3V3 on Bottom Layer "VCC3V3_L02_P002" (solid, remove dead copper, pour order 2): 4285,2235 4295,2245 4790,2245 4800,2235 4800,2186.51 4793.49,2180 4290,2180 4285,2185

## Other copper
Top Layer:
  pour cut-out: 4914.96,2200.76 4911.85,2200.76 4909.96,2198.87 4909.96,2180.01 4920,2185 4928.71,2187.01
  pour cut-out: 4836.57,2048.59 4836.57,2046.45 4839.03,2043.98 4840.05,2045 4880,2045 4881.25,2048.75 4857.87,2072.13
  pour cut-out: 5475.82,2295.06 5469.94,2295.06 5445,2320 5480,2345 5480,2297.06 5480.82,2296.91
  pour cut-out: 5077.37,2212.01 5066.5,2201.14 5059.76,2201.14 5059.76,2139.69 5061.76,2137.69 5168.24,2137.69 5168.24,2212.31
  pour cut-out: 4588.99,2345.29 4588.99,2353.99 4595,2360 4605.09,2349.91 4605.81,2349.91 4605.81,2347.2 4603.9,2345.29
  pour cut-out: 4588.99,2345.29 4588.99,2294.71 4601.01,2294.71 4601.01,2345.29
  pour cut-out: 5639.31,2745.64 5646.7,2738.24 5646.7,2735.29 5649.41,2735.29 5651.32,2737.2 5651.32,2780.29 5639.31,2780.29
  pour cut-out: 5646.7,2615.57 5639.72,2608.59 5639.72,2570.99 5639.68,2570.95 5651.7,2570.95 5651.7,2613.5
  pour cut-out: 5650,2415 5650,2351.98 5671.98,2330 5690,2330 5690,2410 5695,2415
  pour cut-out: 4969.02,2798.89 4970,2799.87 4970,2815 4980,2805 4974.02,2799.02 4974.02,2797
  pour cut-out: 4949.33,2854.2 4949.33,2875 4967.85,2865.82 4954.33,2852.31
  pour cut-out: 4929.65,2949.52 4931.54,2947.63 4937.63,2947.63 4955,2965 4930,2990 4934.92,2985.08
Bottom Layer:
  pour cut-out: 4391.11,2966.85 4391.11,2884.09 4373,2865.97 4386.05,2852.92 4436.69,2852.92 4436.69,2897.65 4419.47,2914.86 4419.47,2954.27
  pour cut-out: 5020.82,2827.15 5007.98,2840 5010,2840 5025,2855 5025.82,2854.18 5025.82,2829
  pour cut-out: 5514.29,2860 5514.29,2836.38 5550.71,2836.38 5550.71,2860
  pour cut-out: 5444.13,2869.77 5433.07,2869.77 5416.86,2853.57 5416.86,2834.87 5454.2,2834.87 5455.71,2836.38 5455.71,2869.1
  pour cut-out: 5451.09,2879.41 5445,2873.32 5445,2870 5453.52,2870 5455.71,2872.18 5455.71,2877.5
  pour cut-out: 5470,2920 5470,2880 5490,2860 5595,2860 5595,2920
  pour cut-out: 4249.54,2609.59 4249.13,2610 4205,2610 4220,2570 4252,2602 4252,2604.98
  pour cut-out: 5195,2525 5197.3,2525 5233.69,2488.62 5235.76,2490.69 5238.69,2490.69 5238.69,2538.69 5240,2540
  pour cut-out: 4165,2515 4174.01,2496.98 4188.43,2511.41 4185.97,2513.87 4185.97,2516.02

## Silkscreen, mask and mechanical layers (free items; w line width, h text height)
Top Overlay:
  text "5V" at 3985,3175 h20
  text "B9" at 4085.79,3175 h20
  text "B8" at 4186.58,3175 h20
  text "B7" at 4287.37,3175 h20
  text "B6" at 4388.16,3175 h20
  text "B5" at 4488.95,3175 h20
  text "B4" at 4589.74,3175 h20
  text "B3" at 4690.53,3175 h20
  text "A15" at 4791.32,3175 h20
  text "A12" at 4892.1,3175 h20
  text "A11" at 4992.89,3175 h20
  text "A10" at 5093.68,3175 h20
  text "A9" at 5194.47,3175 h20
  text "A8" at 5295.26,3175 h20
  text "B15" at 5396.05,3175 h20
  text "B14" at 5496.84,3175 h20
  text "B13" at 5597.63,3175 h20
  text "B12" at 5698.42,3175 h20
  text "3.3" at 5799.21,3175 h20
  text "G" at 5900,3175 h20
  text "G" at 4240,3010 h20
  text "3.3" at 4430,3005 h20
  text "BOOT0" at 4540,2920 h20
  text "BOOT1" at 4540,2820 h20
  text "3.3" at 4250,2615 h20
  text "SWD" at 4250,2511.67 h20
  text "SWC" at 4250,2408.33 h20
  text "G" at 4250,2305 h20
  text "VB" at 4009,1837.59 h20
  text "C13" at 4109.53,1837.59 h20
  text "C14" at 4210.05,1837.59 h20
  text "C15" at 4310.58,1837.59 h20
  text "A0" at 4411.11,1837.59 h20
  text "A1" at 4511.63,1837.59 h20
  text "A2" at 4612.16,1837.59 h20
  text "A3" at 4712.68,1837.59 h20
  text "A4" at 4813.21,1837.59 h20
  text "A5" at 4913.74,1837.59 h20
  text "A6" at 5014.26,1837.59 h20
  text "A7" at 5114.79,1837.59 h20
  text "B0" at 5215.32,1837.59 h20
  text "B1" at 5315.84,1837.59 h20
  text "B10" at 5416.37,1837.59 h20
  text "B11" at 5512.89,1833.59 h20
  text "RE" at 5613.42,1833.59 h20
  text "3.3" at 5713.95,1833.59 h20
  text "G" at 5814.47,1833.59 h20
  text "G" at 5915,1833.59 h20
Mechanical 1:
  lines w10: 3870,1890 3870,3127.52 cw(c3958.74,3131.26) 3955,3220 5985,3220 cw(c5982.5,3132.5) 6070,3135 6070,1895 cw(c5982.5,1897.5) 5985,1810 3955,1810 cw(c3957.5,1897.5) 3870,1895